# Altium PCB led_matrix_board.PcbDoc (part 2 of 2)
Units mm, origin at the board's own origin, x right, y up, seen from the top; angles counter-clockwise.
Board outline 57.94 x 73.23 mm, 4 copper layers (Top Layer, Layer 1, Layer 2, Bottom Layer), stack 0.974 mm thick; 32 components, 45 nets, 161 pads, 637 vias.
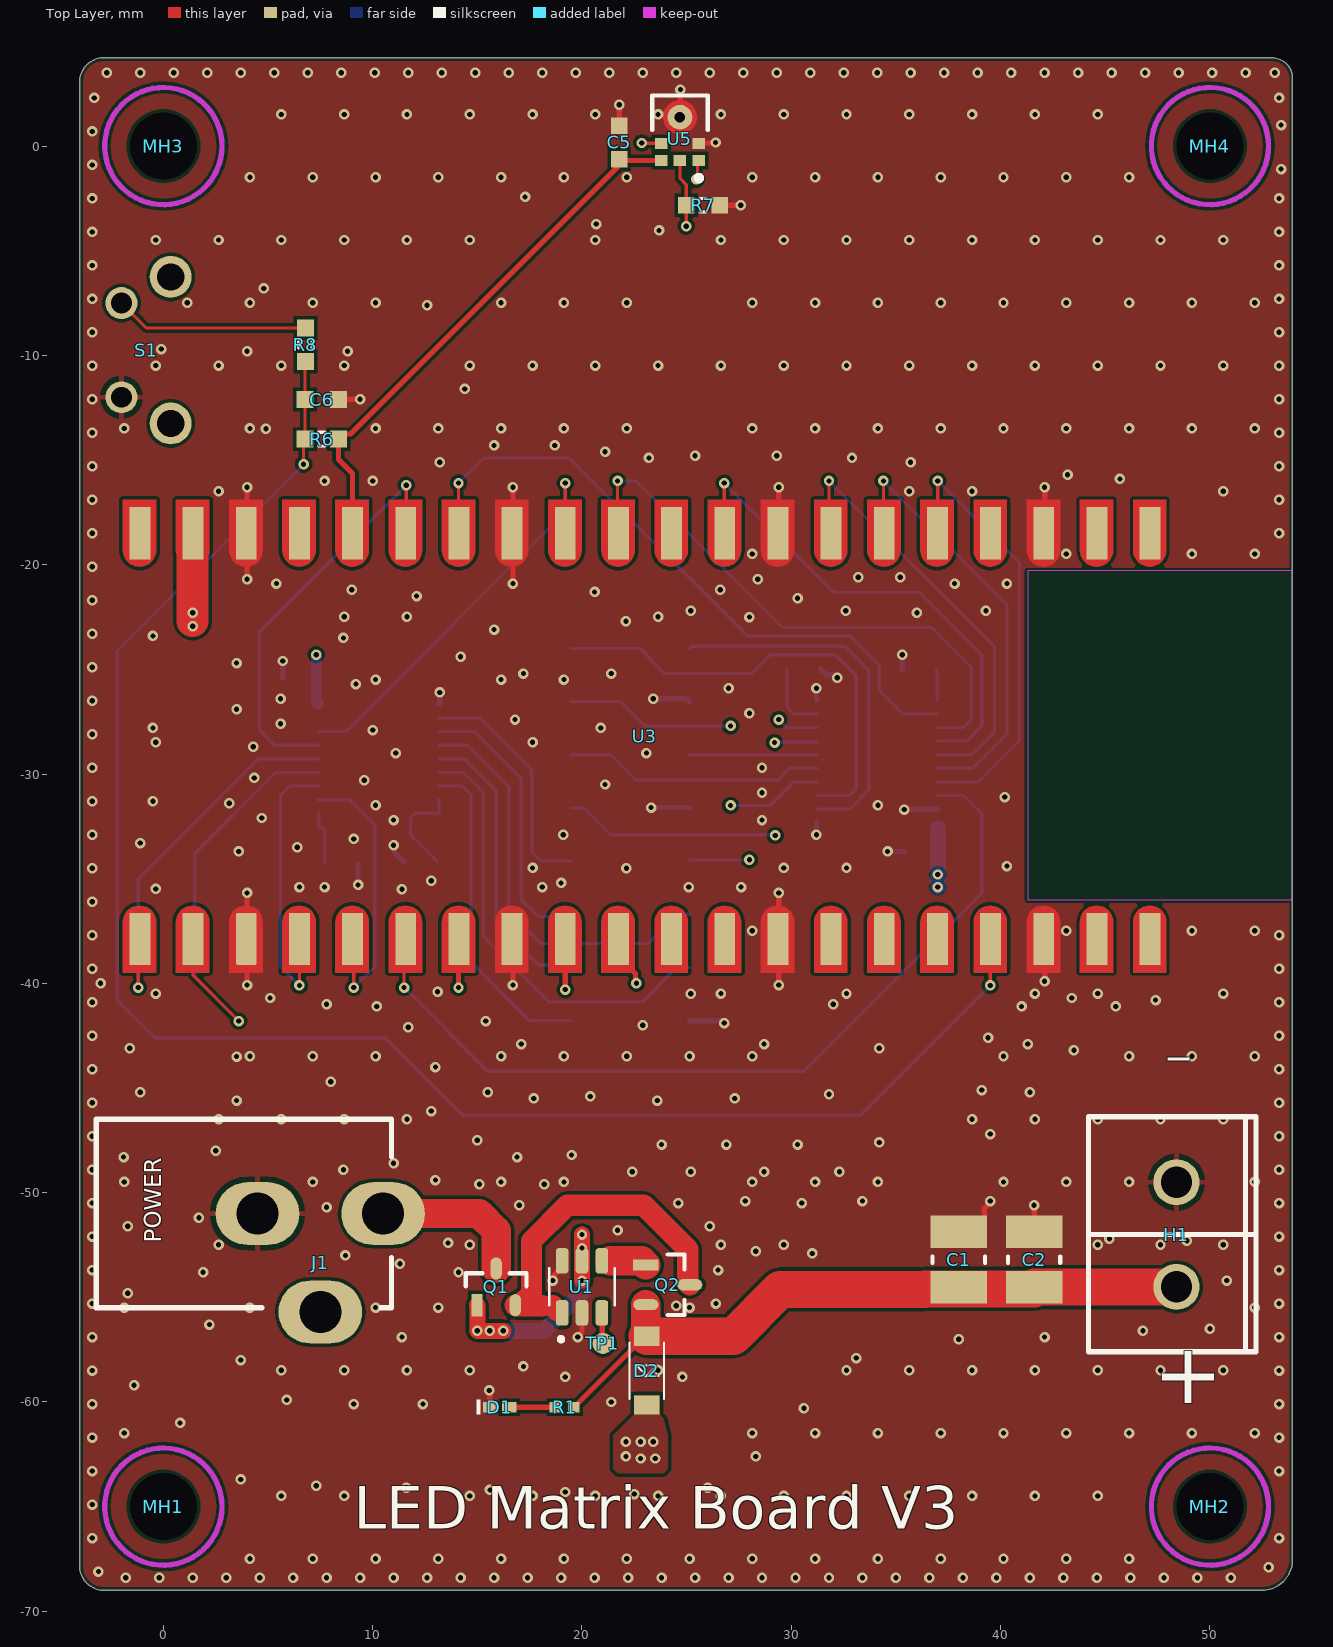
[diagram p0: Top Layer view]

## Silkscreen, mask and mechanical layers (free items; w line width, h text height) (continued)
Fab Notes: (continued)
  text "B. SUPPLIER ID AND TRACEABILITY INFORMATION SHALL NOT / BE APPLIED ON ANY PART OF THE PCB" at -77.873,-58.342 h1.52
  text "C. INK SHALL NOT BE APPLIED TO ANY SOLDERABLE SURFACE." at -77.899,-60.263 h1.52
  text "USING PROVIDED DATA." at -77.899,-62.041 h1.52
  text "6. ELECTRICAL TEST:" at -77.899,-65.597 h1.52
  text "A. DESIGN VERIFICATION SHALL BE DONE PRIOR TO PCB FABRICATION USING" at -77.899,-67.375 h1.52
  text "GERBER DATA AND AN IPC-D-356 NETLIST." at -77.899,-69.153 h1.52
  text "B. ALL PCBS SHALL BE 100% ELECTRICALLY TESTED FOR OPENS AND SHORTS" at -77.899,-70.931 h1.52
  text "C. APPLY TEST STAMP IN NON-LEGEND AREA ON SECONDARY SIDE OF PCB." at -77.899,-72.709 h1.52
  text "Project:" at 54.882,-73.886 h1.52
  text ".Project" at 61.507,-74.202 h2.03
  text "7. FINAL FINISH:" at -77.899,-76.138 h1.52
  text "Company:" at 54.882,-76.186 h1.52
  text "A. FINAL FINISH SHALL BE ELECTROLESS NICKEL/IMMERSION GOLD (ENIG) PER IPC-4552." at -77.899,-78.019 h1.52
  text "Drawn By:" at 54.882,-78.486 h1.52
  text ".Author" at 61.507,-78.661 h2.03
  text "8. IMPEDANCE:" at -77.987,-80.764 h1.52
  text "A. IMPEDANCE TOLERANCE SHALL BE +/- 10%." at -77.987,-82.542 h1.52
  text "Date:" at 54.882,-83.072 h1.52
  text "Rev:" at 73.132,-83.172 h1.52
  text ".ModifiedDate" at 59.631,-83.268 h2.03
  text ".Rev" at 76.382,-83.347 h2.03
  text "B. SEE LAYER STACK-UP FOR IMPEDANCE REQUIREMENTS." at -77.987,-84.32 h1.52
  text "9. IF PANELIZATION SPECIFICATIONS ARE PROVIDED, THE PCBS SHALL BE DELIVERED IN PANEL" at -77.645,-87.441 h1.52
  text "FORM. HOWEVER, THESE SPECIFICATIONS MAY BE REPLACED BY SUPPLIER PREFERRED" at -77.645,-89.219 h1.52
  text "(SPECIFICATIONS AS APPROVED)." at -77.645,-90.997 h1.52
Board:
  lines w0.254: -2.827,-69 52.489,-69 ; -2.824,-69 cw(c-2.824,-67.824) -4,-67.824 -4,3.049 cw(c-2.824,3.049) -2.824,4.225 52.967,4.225 ; 51.559,4.3 51.675,4.416 ; 52.489,-68.992 ccw(c52.489,-67.539) 53.942,-67.539 53.942,3.241 ccw(c52.967,3.241) 52.967,4.216

## Text inside footprints (layer, text, board x,y; h text height)
J1: Top Overlay "POWER" at -0.1,-52.4 h0.8 r90